# Altium PCB CNC.PcbDoc (part 2 of 3)
Units mm, origin at the board's own origin, x right, y up, seen from the top; angles counter-clockwise.
Board outline 148.41 x 98.24 mm, 4 copper layers (Top Layer, Mid-Layer 1, Ground Plane in NEGATIVE, Bottom Layer), stack 0.867 mm thick; 230 components, 218 nets, 997 pads, 307 vias.
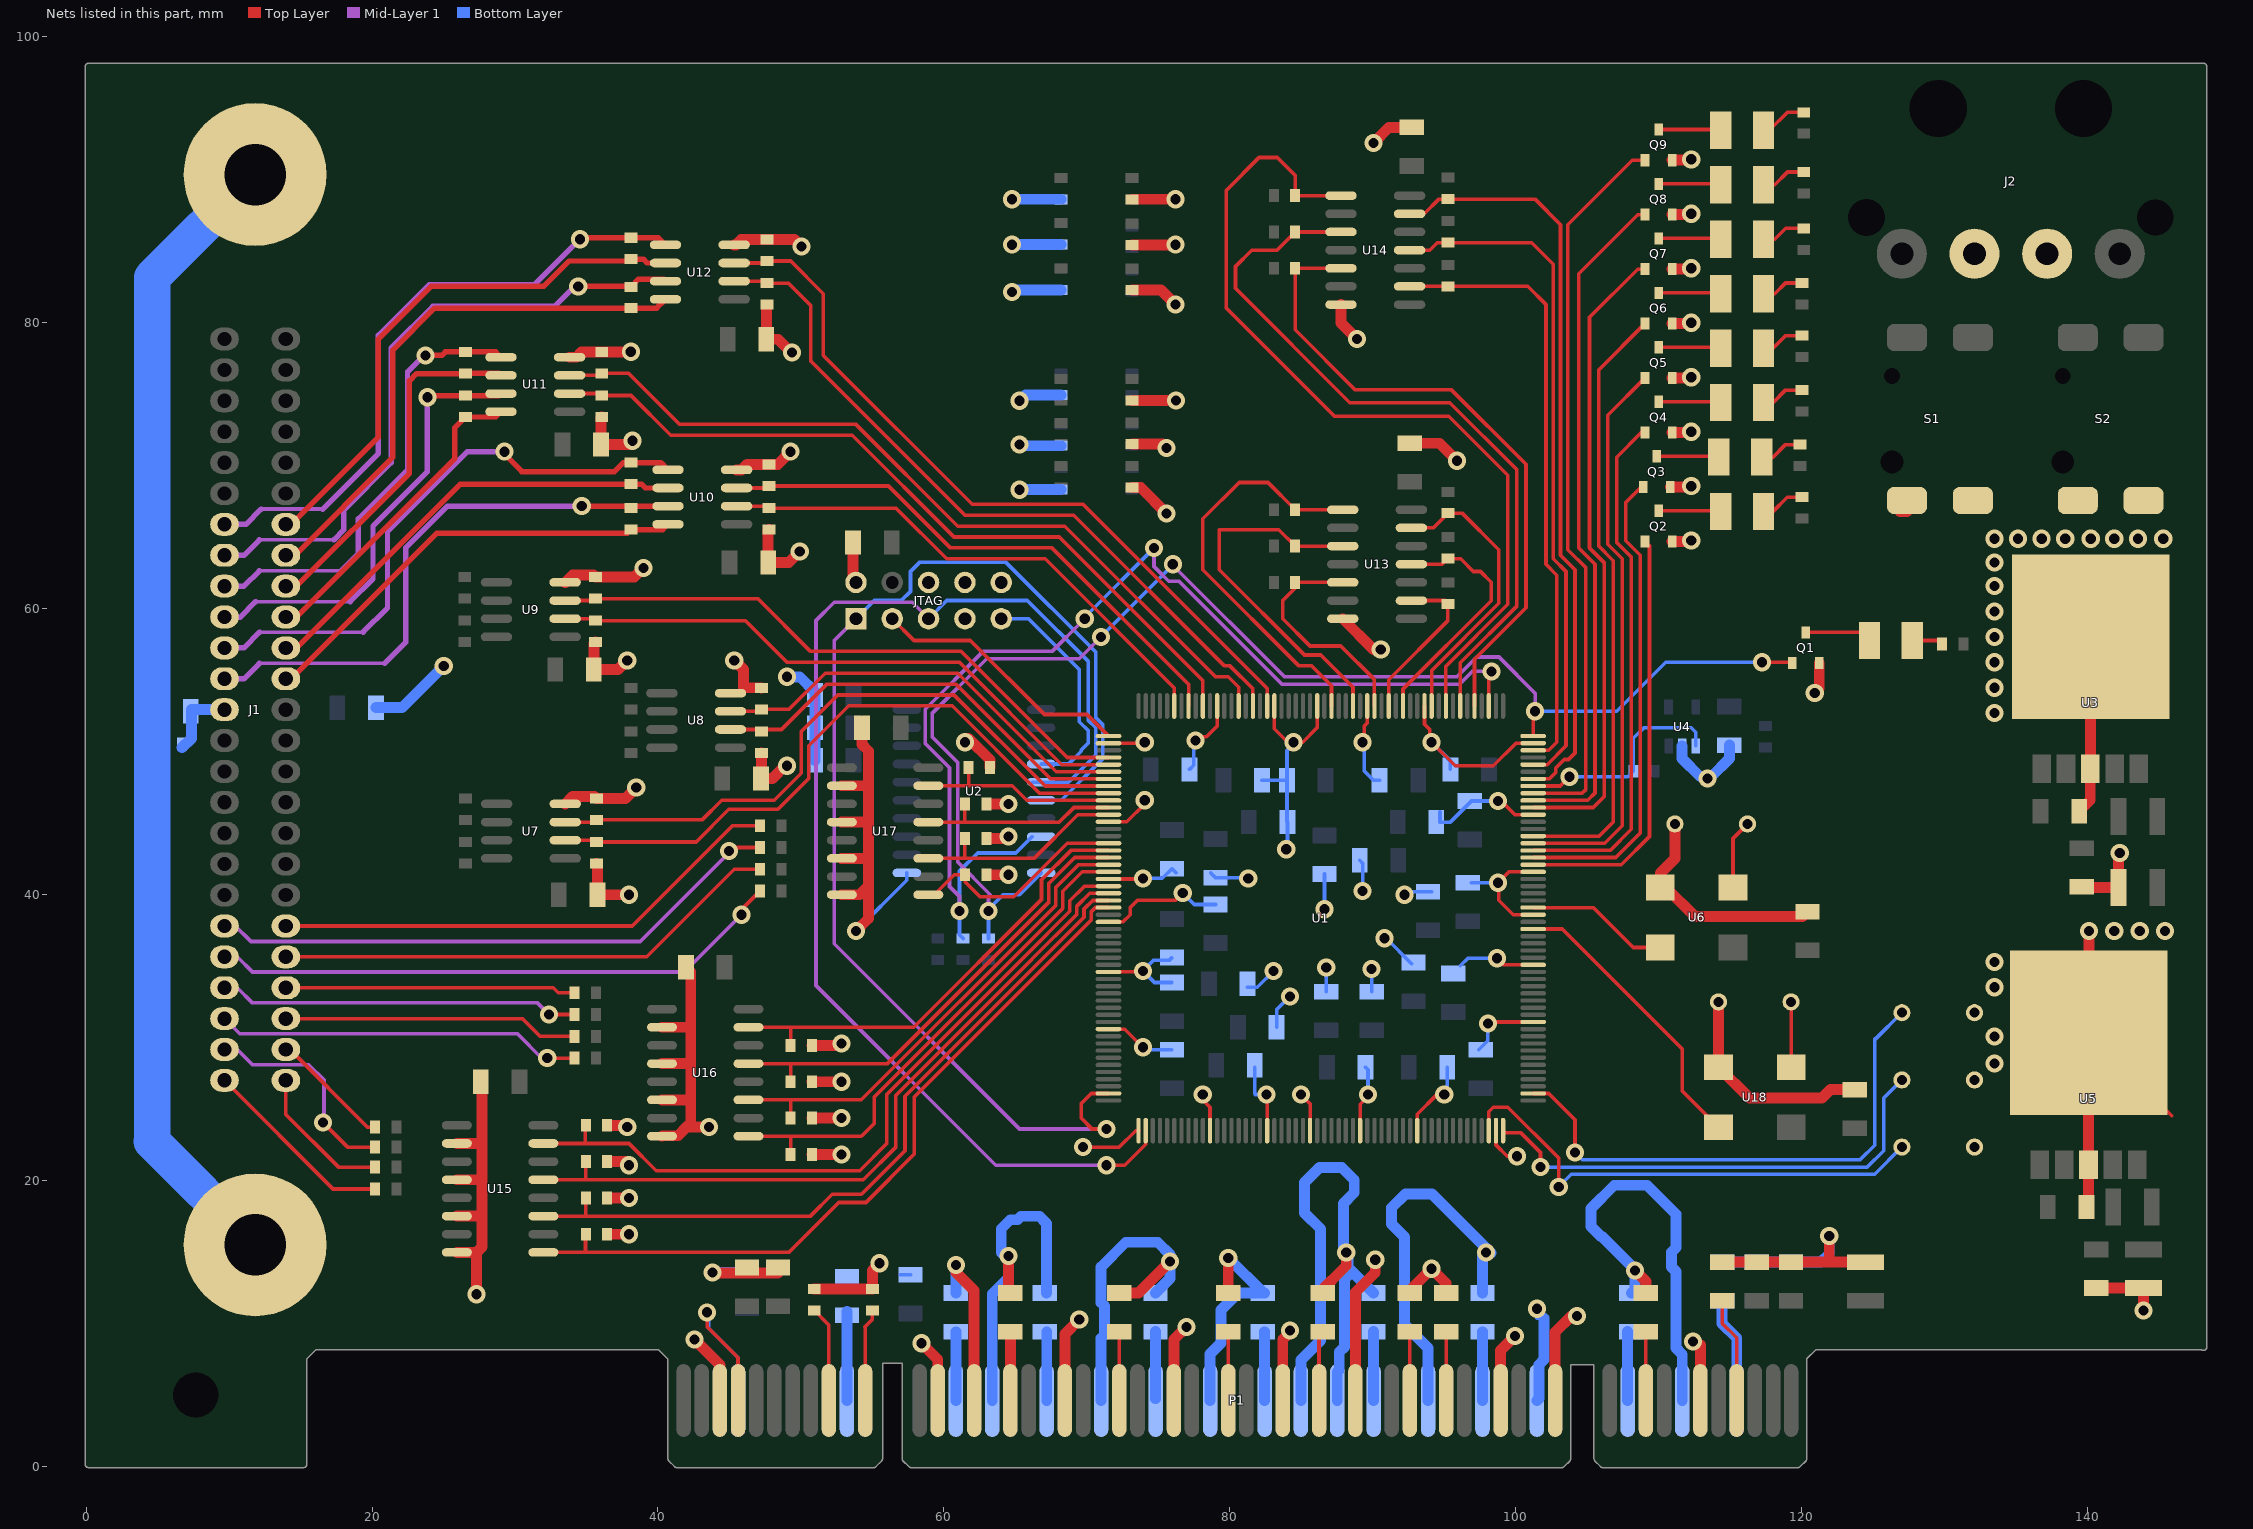
[diagram p4: the nets of this part, all layers, seen from the top]

## Via types
v1: diameter 1.27, hole 0.711, Top Layer to Bottom Layer, 303 vias
v2: diameter 2.032, hole 1.016, Top Layer to Bottom Layer, 3 vias
v3: diameter 1.27, hole 0.711, Top Layer to Bottom Layer, tented top, 1 vias

## Nets (pads, with @x,y where several pads share a name; then routed paths per layer and width w, separated by ;. In a path a pad name is that pad's centre, name@x,y a point inside that pad or via, vN(x,y) a via of type N, cw(c..) or ccw(c..) an arc to the next point about the centre after c; other vN are vias at no path point) (continued)
AD_N: J1.39 R50.2 U10.7 | length 39.8
  Top Layer w0.381: v1(34.671,67.183) R50.2@37.961,67.183 ; R50.2@38.1,67.044 R50.2@37.961,67.183 ; U10.7@40.422,67.183 R50.2@37.961,67.183
  Mid-Layer 1 w0.254: 12.116,56.185 20.879,56.185
  Mid-Layer 1 w0.381: J1.39@9.677,55.107 11.038,55.107 12.116,56.185 ; 20.879,56.185 22.352,57.658 22.352,64.262 25.273,67.183 v1(34.671,67.183)
AD_P: J1.12 R50.1 U10.8 | length 31.2
  Top Layer w0.381: J1.12@13.97,55.107 14.34,55.107 24.511,65.278 37.834,65.278 R50.1@38.1,65.544 40.331,65.544 U10.8@40.7,65.913
AP_N: J1.40 R51.2 U10.5 | length 41.4
  Top Layer w0.381: v1(29.261,70.993) 29.261,70.815 30.48,69.596 36.957,69.596 37.58,70.219 R51.2@38.1,70.219 40.204,70.219 U10.5@40.7,69.723
  Mid-Layer 1 w0.254: 12.141,58.369 19.38,58.369
  Mid-Layer 1 w0.381: J1.40@9.677,57.267 11.039,57.267 12.141,58.369 ; 19.38,58.369 21.082,60.071 21.082,65.405 26.67,70.993 29.007,70.993 29.261,70.739 29.337,70.739 29.261,70.815 v1(29.261,70.993)
AP_P: J1.11 R51.1 U10.6 | length 31.6
  Top Layer w0.381: J1.11@13.97,57.267 14.722,57.267 26.174,68.719 R51.1@38.1,68.719 38.85,68.719 39.116,68.453 U10.6@40.7,68.453
AUX_CLK1: U1.80 U6.3 | length 10.1
  Top Layer w0.254: U1.80@101.21,39.104 105.422,39.104 108.213,36.313 U6.3@110.109,36.313
AUX_CLK2: U1.77 U18.3 | length 20.4
  Top Layer w0.254: U1.77@101.21,37.604 103.239,37.604 111.633,29.21 111.633,26.28 U18.3@114.173,23.74
BD_N: J1.41 R52.2 U11.7 | length 31
  Top Layer w0.381: v1(23.876,74.803) 23.991,74.918 R52.2@26.543,74.918 28.877,74.918 U11.7@29.016,75.057
  Mid-Layer 1 w0.254: 11.862,60.503 18.466,60.503
  Mid-Layer 1 w0.381: J1.41@9.677,59.427 10.786,59.427 11.862,60.503 ; 18.466,60.503 20.066,62.103 20.066,65.786 23.876,69.596 v1(23.876,74.803)
BD_P: J1.10 R52.1 U11.8 | length 22.3
  Top Layer w0.381: J1.10@13.97,59.427 14.723,59.427 25.781,70.485 25.781,72.656 R52.1@26.543,73.418 28.647,73.418 U11.8@29.016,73.787
BP_N: J1.42 R53.2 U11.5 | length 31.7
  Top Layer w0.381: v1(23.749,77.724) 24.892,77.724 25.134,77.966 R53.2@26.543,77.966 28.647,77.966 U11.5@29.016,77.597
  Mid-Layer 1 w0.254: 12.116,62.662 17.831,62.662
  Mid-Layer 1 w0.381: J1.42@9.677,61.587 11.041,61.587 12.116,62.662 ; 17.831,62.662 19.05,63.881 19.05,66.294 22.479,69.723 22.479,76.581 23.622,77.724 v1(23.749,77.724)
BP_P: J1.9 R53.1 U11.6 | length 25.1
  Top Layer w0.381: J1.9@13.97,61.587 14.724,61.587 22.606,69.469 22.606,75.946 23.114,76.454 26.531,76.454 R53.1@26.543,76.466 28.877,76.466 U11.6@29.016,76.327
CD_N: J1.43 R54.2 U12.7 | length 44.4
  Top Layer w0.381: v1(34.417,82.55) 38.076,82.55 R54.2@38.1,82.526 38.632,83.058 40.387,83.058 U12.7@40.526,82.919
  Mid-Layer 1 w0.254: 12.116,64.821 17.323,64.821
  Mid-Layer 1 w0.381: J1.43@9.677,63.747 11.042,63.747 12.116,64.821 ; 17.323,64.821 18.034,65.532 18.034,66.929 21.336,70.231 21.336,78.232 24.257,81.153 32.766,81.153 34.163,82.55 v1(34.417,82.55)
CD_P: J1.8 R54.1 U12.8 | length 38.4
  Top Layer w0.381: J1.8@13.97,63.747 14.598,63.747 21.463,70.612 21.463,78.105 24.384,81.026 R54.1@38.1,81.026 39.903,81.026 U12.8@40.526,81.649
CP_N: J1.44 R55.2 U12.5 | length 44.2
  Top Layer w0.381: v1(34.544,85.852) 34.647,85.955 R55.2@38.1,85.955 40.03,85.955 U12.5@40.526,85.459
  Mid-Layer 1 w0.254: 12.243,66.98 16.561,66.98
  Mid-Layer 1 w0.381: J1.44@9.677,65.907 11.17,65.907 12.243,66.98 ; 16.561,66.98 20.447,70.866 20.447,79.121 24.003,82.677 31.369,82.677 v1(34.544,85.852)
CP_P: J1.7 R55.1 U12.6 | length 38.4
  Top Layer w0.381: J1.7@13.97,65.907 14.345,65.907 20.447,72.009 20.447,78.867 24.13,82.55 32.004,82.55 33.782,84.328 37.973,84.328 R55.1@38.1,84.455 38.977,84.455 39.243,84.189 U12.6@40.526,84.189
FPGA_AD: R75.2 U1.151 U10.2 | length 37.1
  Top Layer w0.254: U10.2@45.5,67.183 47.613,67.183 R75.2@47.752,67.044 56.654,67.044 60.198,63.5 67.078,63.5 76.11,54.468 U1.151@76.11,53.204
FPGA_AP: R76.1 U1.149 U10.3 | length 38.9
  Top Layer w0.254: U10.3@45.5,68.453 47.613,68.453 R76.1@47.752,68.592 56.122,68.592 60.452,64.262 67.564,64.262 77.11,54.716 U1.149@77.11,53.204
FPGA_BD: R61.1 U1.147 U11.2 | length 54.4
  Top Layer w0.254: U11.2@33.816,75.057 35.929,75.057 R61.1@36.068,74.918 38.112,74.918 40.894,72.136 53.594,72.136 60.706,65.024 68.072,65.024 78.11,54.986 U1.147@78.11,53.204
FPGA_BP: R62.2 U1.142 U11.3 | length 57.3
  Top Layer w0.254: U11.3@33.816,76.327 35.929,76.327 R62.2@36.068,76.466 37.961,76.466 41.529,72.898 53.848,72.898 60.96,65.786 68.453,65.786 78.994,55.245 79.883,55.245 80.61,54.518 U1.142@80.61,53.204
FPGA_CD: R79.2 U1.140 U12.2 | length 51.6
  Top Layer w0.254: U12.2@45.326,82.919 47.486,82.919 R79.2@47.625,82.78 49.125,82.78 50.673,81.232 50.673,77.343 61.468,66.548 69.088,66.548 79.629,56.007 80.01,56.007 81.61,54.407 U1.140@81.61,53.204
FPGA_CP: R80.1 U1.138 U12.3 | length 53.5
  Top Layer w0.254: U12.3@45.326,84.189 47.486,84.189 R80.1@47.625,84.328 49.276,84.328 51.562,82.042 51.562,77.724 61.976,67.31 69.723,67.31 82.61,54.423 U1.138@82.61,53.204
FPGA_IN1: R90.2 U1.178 U15.15 | length 52.3
  Top Layer w0.254: U15.15@31.981,22.606 34.914,22.606 ; R90.2@34.949,23.876 34.914,23.841 34.914,22.606 ; 65.756,35.784 56.007,26.035 56.007,22.606 54.102,20.701 39.878,20.701 37.973,22.606 34.914,22.606 ; 65.756,35.792 68.807,38.842 68.807,39.583 69.827,40.604 U1.178@71.51,40.604
FPGA_IN2: R89.2 U1.179 U15.13 | length 51.7
  Top Layer w0.254: U15.13@31.981,20.066 34.925,20.066 ; R89.2@34.822,21.209 R89.2@34.949,21.336 34.949,20.09 34.925,20.066 ; 66.182,35.518 69.302,38.637 69.302,39.208 70.198,40.104 U1.179@71.51,40.104 ; 66.186,35.514 56.642,25.97 56.642,22.352 54.356,20.066 34.925,20.066
FPGA_IN3: R88.2 U1.180 U15.11 | length 52.7
  Top Layer w0.254: U15.11@31.981,17.526 35.052,17.526 ; R88.2@34.822,18.669 R88.2@34.949,18.796 34.949,17.629 35.052,17.526 ; U1.180@71.51,39.604 70.398,39.604 69.797,39.003 69.797,38.432 66.681,35.316 66.681,35.309 57.277,25.904 57.277,22.098 54.229,19.05 52.197,19.05 50.673,17.526 35.052,17.526
FPGA_IN4: R87.2 U1.181 U15.9 | length 53.5
  Top Layer w0.254: U15.9@31.981,14.986 34.925,14.986 ; R87.2@34.949,16.256 34.925,16.232 34.925,14.986 ; U1.181@71.552,39.091 71.534,39.109 70.604,39.109 70.292,38.798 70.292,38.227 67.177,35.111 67.177,35.103 57.912,25.839 57.912,21.844 54.547,18.479 52.642,18.479 49.149,14.986 34.925,14.986
FPGA_IN5: R106.2 U1.173 U16.15 | length 32.4
  Top Layer w0.254: U16.15@46.332,30.734 49.276,30.734 ; R106.2@49.276,29.464 49.276,30.734 ; U1.173@71.51,43.104 68.885,43.104 66.825,41.044 66.825,39.663 57.896,30.734 49.276,30.734
FPGA_IN6: R105.2 U1.174 U16.13 | length 33.2
  Top Layer w0.254: U16.13@46.332,28.194 49.149,28.194 ; R105.2@49.276,26.924 49.276,28.067 49.149,28.194 ; U1.174@71.51,42.604 69.147,42.604 67.321,40.778 67.321,39.458 56.057,28.194 49.149,28.194
FPGA_IN7: R104.2 U1.175 U16.11 | length 34
  Top Layer w0.254: U16.11@46.332,25.654 49.276,25.654 ; R104.2@49.276,24.384 49.276,25.654 ; U1.175@71.51,42.104 69.409,42.104 67.816,40.511 67.816,39.253 54.217,25.654 49.276,25.654
FPGA_IN8: R103.2 U1.176 U16.9 | length 35.9
  Top Layer w0.254: U16.9@46.332,23.114 49.276,23.114 ; R103.2@49.276,21.844 49.276,23.114 ; 55.118,25.837 55.118,24.003 54.229,23.114 49.276,23.114 ; 55.12,25.856 64.389,35.125 68.311,39.048 68.311,40.244 69.671,41.604 U1.176@71.51,41.604
FPGA_IN9: R102.2 U1.166 U17.15 | length 14.3
  Top Layer w0.254: U17.15@58.905,47.625 61.722,47.625 ; R102.2@61.734,48.895 61.734,47.637 61.722,47.625 ; U1.166@71.51,46.604 65.791,46.604 64.77,47.625 61.722,47.625
FPGA_IN10: R101.2 U1.167 U17.13 | length 14
  Top Layer w0.254: U17.13@58.905,45.085 61.468,45.085 ; R101.2@61.468,46.089 61.468,45.085 ; U1.167@71.51,46.104 69.091,46.104 68.072,45.085 61.468,45.085
FPGA_IN11: R100.2 U1.168 U17.11 | length 15
  Top Layer w0.254: U17.11@58.905,42.545 61.468,42.545 ; R100.2@61.468,43.676 61.468,42.545 ; U1.168@71.51,45.604 69.353,45.604 66.294,42.545 61.468,42.545
FPGA_IN12: R99.2 U1.172 U17.9 | length 15.7
  Top Layer w0.254: U17.9@58.905,40.005 59.33,40.005 60.727,41.402 R99.2@61.48,41.402 61.48,40.904 62.519,39.865 64.884,39.865 68.623,43.604 U1.172@71.51,43.604
FPGA_OUT1: R63.1 U1.129 U13.1 | length 29
  Top Layer w0.254: U1.129@87.11,53.204 87.11,54.622 85.725,56.007 84.836,56.007 78.105,62.738 78.105,66.294 80.645,68.834 82.665,68.834 R63.1@84.57,66.929 U13.1@87.897,66.929
FPGA_OUT2: R64.1 U1.126 U13.3 | length 26
  Top Layer w0.254: U13.3@87.897,64.389 R64.1@84.57,64.389 83.427,65.532 79.248,65.532 79.248,62.738 85.217,56.769 86.36,56.769 88.61,54.519 U1.126@88.61,53.204
FPGA_OUT3: R65.1 U1.123 U13.5 | length 16.3
  Top Layer w0.254: U13.5@87.897,61.849 R65.1@84.57,61.849 84.57,61.456 83.693,60.579 83.693,59.309 85.598,57.404 87.757,57.404 90.11,55.051 U1.123@90.11,53.204
FPGA_OUT4: R66.1 U1.121 U13.9 | length 11.5
  Top Layer w0.254: U1.121@91.11,53.204 91.11,55.042 95.25,59.182 R66.1@95.25,60.337 95.008,60.579 U13.9@92.697,60.579
FPGA_OUT5: R67.1 U1.119 U13.11 | length 17.7
  Top Layer w0.254: U1.119@92.11,53.204 92.11,54.391 98.285,60.566 98.285,61.862 97.536,62.611 97.028,62.611 96.139,63.5 95.262,63.5 R67.1@95.25,63.512 94.857,63.119 U13.11@92.697,63.119
FPGA_OUT6: R68.1 U1.115 U13.13 | length 20.5
  Top Layer w0.254: U13.13@92.697,65.659 94.222,65.659 R68.1@95.25,66.687 95.262,66.675 96.266,66.675 98.806,64.135 98.806,60.387 94.11,55.691 U1.115@94.11,53.204
FPGA_OUT7: R69.1 U1.113 U14.1 | length 61.6
  Top Layer w0.254: U14.1@87.77,88.9 R69.1@84.57,88.9 84.57,90.309 83.312,91.567 82.042,91.567 79.756,89.281 79.756,81.026 87.313,73.469 95.314,73.469 99.441,69.342 99.441,60.321 95.11,55.99 U1.113@95.11,53.204
FPGA_OUT8: R70.1 U1.111 U14.3 | length 53
  Top Layer w0.254: U14.3@87.77,86.36 R70.1@84.57,86.36 83.3,85.09 81.534,85.09 80.391,83.947 80.391,82.423 88.392,74.422 95.377,74.422 100.076,69.723 100.076,60.198 96.11,56.232 U1.111@96.11,53.204
FPGA_OUT9: R71.1 U1.109 U14.5 | length 45.9
  Top Layer w0.254: U14.5@87.77,83.82 R71.1@84.57,83.82 84.57,79.514 88.773,75.311 95.504,75.311 100.711,70.104 100.711,60.071 97.11,56.47 U1.109@97.11,53.204
FPGA_OUT10: R72.1 U1.102 U14.9 | length 42.9
  Top Layer w0.254: U14.9@92.57,82.55 95.238,82.55 R72.1@95.25,82.562 100.826,82.562 102.108,81.28 102.108,63.119 102.87,62.357 102.87,50.673 102.301,50.104 U1.102@101.21,50.104
FPGA_OUT11: R73.1 U1.100 U14.11 | length 47.8
  Top Layer w0.254: U14.11@92.57,85.09 93.98,85.09 94.5,85.61 R73.1@95.25,85.61 101.104,85.61 102.616,84.098 102.616,63.5 103.505,62.611 103.505,50.419 102.19,49.104 U1.100@101.21,49.104
FPGA_OUT12: R74.1 U1.98 U14.13 | length 53
  Top Layer w0.254: U14.13@92.57,87.63 93.599,87.63 94.627,88.658 R74.1@95.25,88.658 101.334,88.658 103.124,86.868 103.124,63.754 104.14,62.738 104.14,49.911 103.688,49.459 103.383,49.459 102.785,48.861 102.785,48.556 102.333,48.104 U1.98@101.21,48.104
FPGA_RESET: R12.1 U1.97 U4.1 | length 15.5
  Top Layer w0.254: U1.97@101.21,47.604 103.103,47.604 v1(103.759,48.26)
  Bottom Layer w0.254: v1(103.759,48.26) 107.835,48.26 R12.1@108.216,48.641 108.216,50.939 108.966,51.689 112.268,51.689 112.583,51.374 U4.1@112.583,50.419
FPGA_XD: R81.1 U1.165 U7.2 | length 45.9
  Top Layer w0.254: U7.2@33.515,43.815 35.56,43.815 R81.1@35.687,43.688 42.672,43.688 44.958,45.974 48.387,45.974 50.546,48.133 50.546,50.419 53.34,53.213 60.579,53.213 66.688,47.104 U1.165@71.51,47.104
FPGA_XP: R82.2 U1.164 U7.3 | length 46
  Top Layer w0.254: U7.3@33.515,45.085 35.536,45.085 R82.2@35.687,45.236 43.077,45.236 44.45,46.609 48.133,46.609 50.025,48.501 50.025,51.422 52.578,53.975 60.706,53.975 67.077,47.604 U1.164@71.51,47.604
FPGA_YD: R77.2 U1.163 U8.2 | length 30.6
  Top Layer w0.254: U8.2@45.072,51.562 47.105,51.562 R77.2@47.244,51.423 47.383,51.562 48.641,51.562 51.816,54.737 60.833,54.737 67.466,48.104 U1.163@71.51,48.104
FPGA_YP: R78.1 U1.162 U8.3 | length 30.4
  Top Layer w0.254: U8.3@45.072,52.832 47.105,52.832 R78.1@47.244,52.971 49.161,52.971 51.689,55.499 60.96,55.499 67.855,48.604 U1.162@71.51,48.604
FPGA_ZD: R59.1 U1.161 U9.2 | length 42.2
  Top Layer w0.254: U9.2@33.502,59.309 35.488,59.309 R59.1@35.627,59.17 46.113,59.17 49.022,56.261 61.087,56.261 68.244,49.104 U1.161@71.51,49.104
FPGA_ZP: R60.2 U1.160 U9.3 | length 42.7
  Top Layer w0.254: U9.3@33.502,60.579 35.488,60.579 R60.2@35.627,60.718 46.978,60.718 50.673,57.023 61.214,57.023 68.633,49.604 U1.160@71.51,49.604
GND: C1.1 Cb12.+ Cb13.+ Cb18.+ Cb19.+ Cb20.+ Cb26.+ Cb28.+ Cb38.+ Cb39.+ Cb53.+ Cb65.+ Cb66.+ Cb76.+ Cb78.+ Cb91.+ Cb92.+ Cb105.+ Cb117.+ Cb118.+ Cb128.+ Cb130.+ Cb143.+ Cb144.+ Cb156.+ Cb170.+ Cb171.+ Cb184.+ Cb186.+ Cb196.+ Cb197.+ Cb208.+ CbA5.+ CbA8.+ CbA10.+ CbA16.+ CbA21.+ CbA27.+ CbA33.+ CbA39.+ CbA45.+ CbA53.+ CbA59.+ CbA61.+ CbA62.+ CbB5.+ CbB6.+ CbB19.+ CbB25.+ CbB31.+ CbB36.+ CbB41.+ CbB43.+ CbB54.+ CbB59.+ CbB61.+ CbB62.+ CbJ1.+ CbJ.+ CbU4.+ CbU6.+ CbU7.+ CbU8.+ CbU9.+ CbU10.+ CbU11.+ CbU12.+ CbU13.+ CbU14.+ CbU15.+ CbU16.+ CbU17.+ CbU18.+ Cp1.+ Cp2.+ Cp3.+ Cp4.+ J1.38 J2.2 J2.3 JTAG.2 JTAG.6 JTAG.7 JTAG.8 JTAG.10 M0.1 M1.1 M2.1 O1E.1 O2E.1 P1.A18 P1.A24 P1.A30 P1.A35 P1.A37 P1.A42 P1.A48 P1.A56 P1.B3 P1.B15 P1.B17 P1.B22 P1.B28 P1.B34 P1.B38 P1.B46 P1.B49 P1.B57 Q1.2 Q2.2 Q3.2 Q4.2 Q5.2 Q6.2 Q7.2 Q8.2 Q9.2 R5.1 R6.1 R8.2 R10.2 R21.1 R22.2 R23.2 R24.2 R25.2 R26.2 R27.2 R28.2 R29.2 R30.2 R31.2 R32.2 R33.2 R59.2 R60.1 R61.2 R62.1 R75.1 R76.2 R77.1 R78.2 R79.1 R80.2 R81.2 R82.1 R87.1 R88.1 R89.1 R90.1 R99.1 R100.1 R101.1 R102.1 R103.1 R104.1 R105.1 R106.1 R107.2 S1.C1 S1.C2 S2.C1 S2.C2 U1.1 U1.11 U1.19 U1.25 U1.32 U1.40 U1.51 U1.64 U1.72 U1.79 U1.85 U1.93 U1.103 U1.116 U1.124 U1.131 U1.137 U1.145 U1.158 U1.169 U1.177 U1.183 U1.190 U1.198 U2.11 U3.G U4.2 U5.G U6.2 U7.4 U8.4 U9.4 U10.4 U11.4 U12.4 U13.7 U14.7 U15.2 U15.4 U15.6 U15.8 U16.2 U16.4 U16.6 U16.8 U17.2 U17.4 U17.6 U17.8 U18.2 | length 747.8
  Top Layer w0.254: v1(42.545,8.89) v1@42.799,8.89 ; v1(69.723,22.352) 72.263,22.352 73.415,23.504 U1.1@73.61,23.504 ; U1.198@71.51,30.604 72.647,30.604 v1(73.914,29.337) ; U1.190@71.51,34.604 73.847,34.604 v1(73.914,34.671) ; U1.183@71.51,38.104 72.521,38.104 73.025,38.608 73.025,39.116 73.533,39.624 76.2,39.624 v1(76.708,40.132) ; U1.177@71.51,41.104 73.87,41.104 v1(73.914,41.148) ; U1.169@71.51,45.104 72.79,45.104 74.041,46.355 v1(74.041,46.609) ; U1.158@71.51,50.604 73.972,50.604 v1(74.041,50.673) ; v1(77.597,50.8) 77.597,50.927 77.788,50.736 78.105,51.054 78.359,51.054 79.11,51.805 U1.145@79.11,53.204 ; v1@77.978,25.781 77.978,26.035 v1(78.105,26.035) 78.105,25.654 78.61,25.149 U1.11@78.61,23.504 ; U1.19@82.61,24.393 v1@82.61,26.102 ; U1.137@83.11,53.204 83.11,51.614 84.051,50.673 v1(84.455,50.673) 85.09,50.673 86.11,51.693 U1.131@86.11,53.204 ; v1@84.201,9.398 v1(84.201,9.525) v1@84.201,9.652 ; v1(84.963,26.035) 85.61,25.388 U1.25@85.61,23.504 ; U1.32@89.11,23.504 89.11,25.356 89.662,25.908 v1(89.662,26.035) ; v1(89.281,50.673) 89.408,50.8 89.408,51.816 89.61,52.018 U1.124@89.61,53.204 ; U1.40@93.11,23.504 93.11,24.657 94.488,26.035 v1(94.996,26.035) ; U1.116@93.61,53.204 93.61,51.932 93.98,51.562 93.98,50.8 v1(94.107,50.673) 95.758,49.022 98.425,49.022 100.007,50.604 U1.103@101.21,50.604 ; v1@98.044,31.104 U1.64@101.21,31.104 ; U1.51@98.61,23.504 98.61,22.497 99.39,21.717 v1(100.076,21.717) ; v1(98.679,35.56) 99.135,35.104 U1.72@101.21,35.104 ; v1(98.759,46.562) 98.933,46.736 98.933,46.609 99.938,45.604 U1.93@101.21,45.604 ; U1.79@101.21,38.604 99.826,38.604 98.806,39.624 98.806,40.894 99.516,41.604 U1.85@101.21,41.604 ; v1(112.395,8.763) 112.649,8.763 v1@112.909,8.503 ; U5.G@140.081,30.353 145.881,24.553 ; v1@76.585,9.931 76.737,9.779 v1(76.962,9.779) 76.81,9.931 v1@76.585,9.931
  Top Layer w0.762: U15.8@25.931,14.986 27.305,14.986 ; U15.6@25.931,17.526 27.559,17.526 ; U15.4@25.931,20.066 27.559,20.066 ; U15.2@25.931,22.606 27.686,22.606 ; v1(27.305,12.065) 27.305,14.986 ; CbU15.+@27.606,26.924 27.686,26.844 27.686,22.606 ; U9.4@33.502,61.849 33.528,61.849 34.036,62.357 35.488,62.357 R60.1@35.627,62.218 38.342,62.218 v1(38.989,62.865) ; U7.4@33.515,46.355 34.023,46.863 35.56,46.863 R82.1@35.687,46.736 37.719,46.736 v1(38.481,47.498) ; U11.4@33.816,77.597 34.29,77.597 34.659,77.966 R62.1@36.068,77.966 38.088,77.966 v1(38.1,77.978) ; R59.2@35.627,57.67 35.513,57.556 CbU9.+@35.513,55.753 37.211,55.753 v1(37.846,56.388) ; R81.2@35.687,42.188 35.767,42.108 CbU7.+@35.767,40.005 v1(37.973,40.005) ; R61.2@36.068,73.418 36.021,73.371 CbU11.+@36.021,71.501 37.973,71.501 v1(38.227,71.755) ; R87.1@36.449,16.256 v1(37.973,16.256) ; R88.1@36.449,18.796 v1(37.973,18.796) ; R89.1@36.449,21.336 37.719,21.336 v1(37.973,21.082) ; R90.1@36.449,23.876 37.719,23.876 v1(37.846,23.749) ; U16.8@40.282,23.114 40.315,23.147 41.402,23.147 42.004,23.749 ; U16.6@40.282,25.654 41.957,25.654 ; U16.4@40.282,28.194 41.83,28.194 ; U16.2@40.282,30.734 42.291,30.734 ; CbU16.+@41.957,34.925 42.291,34.591 42.291,30.734 ; v1(42.545,8.89) 44.329,7.106 P1.B3@44.329,4.628 ; v1(43.561,23.749) 42.004,23.749 ; v1(43.815,13.589) 43.862,13.542 CbB6.+@48.387,13.542 ; U12.4@45.326,85.459 45.454,85.459 45.823,85.828 R80.2@47.625,85.828 49.554,85.828 v1(50.038,85.344) ; v1(45.339,56.388) 45.974,55.753 45.974,54.483 47.232,54.483 R78.2@47.244,54.471 ; U10.4@45.5,69.723 45.847,69.723 46.216,70.092 R76.2@47.752,70.092 48.375,70.092 v1(49.276,70.993) ; CbU8.+@47.197,48.133 CbU8.+@47.244,48.133 ; R77.1@47.244,49.923 CbU8.+@47.244,48.133 ; R79.1@47.578,81.233 CbU12.+@47.578,78.855 48.399,78.855 49.318,77.936 v1(49.361,77.936) ; R75.1@47.752,65.544 47.705,65.497 CbU10.+@47.705,63.246 49.149,63.246 v1(49.911,64.008) ; v1(49.022,49.022) 48.895,49.022 48.006,48.133 CbU8.+@47.244,48.133 ; R103.1@50.776,21.844 v1(52.832,21.844) ; R104.1@50.776,24.384 v1(52.832,24.384) ; R105.1@50.776,26.924 v1(52.832,26.924) ; R106.1@50.776,29.464 52.832,29.464 v1(52.832,29.591) ; R5.1@50.927,12.434 R6.1@54.991,12.434 54.991,13.716 v1(55.499,14.224) ; U17.8@52.855,40.005 54.102,40.005 54.737,40.64 ; U17.6@52.855,42.545 54.737,42.545 ; U17.4@52.855,45.085 54.737,45.085 ; U17.2@52.855,47.625 54.737,47.625 ; CbJ.+@53.641,64.643 53.641,62.056 JTAG.2@53.848,61.849 ; v1(53.848,37.465) 54.737,38.354 54.737,40.64 ; CbU17.+@54.276,51.689 54.276,50.499 54.737,50.038 54.737,47.625 ; v1(58.42,8.636) 59.569,7.487 P1.B15@59.569,4.628 ; v1(60.833,14.097) 60.833,13.589 62.109,12.313 P1.B17@62.109,4.628 ; v1(61.468,50.673) 61.595,50.8 v1@61.595,50.546 ; v1@61.722,50.927 63.234,49.415 R102.1@63.234,48.895 ; R99.1@63.234,41.402 64.389,41.402 v1(64.516,41.402) ; R100.1@63.234,43.942 64.262,43.942 64.389,44.069 v1(64.516,44.069) ; R101.1@63.234,46.355 64.262,46.355 v1(64.516,46.355) ; v1(64.516,14.732) 64.516,12.272 CbB19.+@64.643,12.145 ; P1.B22@68.459,4.628 68.459,9.277 v1(69.469,10.287) ; CbB25.+@72.263,12.145 CbB25.+@72.269,12.145 73.613,12.145 v1(75.819,14.351) ; R24.2@73.152,68.477 73.763,68.477 v1(75.565,66.675) ; R23.2@73.152,71.525 75.287,71.525 v1(75.565,71.247) ; R22.2@73.152,74.573 v1(76.224,74.573) ; R30.2@73.152,82.296 75.184,82.296 v1(76.2,81.28) ; R29.2@73.152,85.459 76.188,85.459 v1(76.2,85.471) ; R28.2@73.152,88.646 v1(76.2,88.646) ; P1.B28@76.079,4.628 76.079,8.896 v1(76.962,9.779) ; CbB31.+@79.883,12.145 v1(79.883,14.605) ; P1.B34@83.699,4.628 83.699,8.896 v1@84.201,9.398 ; CbB36.+@86.233,12.145 88.138,14.05 v1(88.138,14.986) ; U14.7@87.77,81.28 87.77,79.997 v1(88.9,78.867) ; U13.7@87.897,59.309 90.056,57.15 v1(90.551,57.15) ; P1.B38@88.779,4.628 88.779,12.198 90.17,13.589 v1(90.17,14.478) ; v1(90.043,92.583) 91.139,93.679 CbU14.+@92.71,93.679 ; CbB41.+@92.583,12.145 92.583,12.319 v1(94.107,13.843) 95.123,12.827 CbB43.+@95.123,12.145 ; CbU13.+@92.583,71.581 94.662,71.581 v1(95.885,70.358) ; P1.B46@98.939,4.628 98.939,8.134 v1(99.949,9.144) ; P1.B49@102.749,4.628 102.749,9.404 103.886,10.541 v1(104.267,10.541) ; v1(108.331,13.716) 109.093,12.954 CbB54.+@109.093,12.145 ; Q3.2@110.805,68.521 112.209,68.521 v1(112.268,68.58) ; Q2.2@110.932,64.711 112.209,64.711 v1(112.268,64.77) ; Q4.2@110.932,72.331 112.209,72.331 v1(112.268,72.39) ; Q5.2@110.932,76.141 112.209,76.141 v1(112.268,76.2) ; Q6.2@110.932,79.951 112.209,79.951 v1(112.268,80.01) ; Q7.2@110.932,83.761 112.209,83.761 v1(112.268,83.82) ; Q8.2@110.932,87.571 112.209,87.571 v1(112.268,87.63) ; Q9.2@110.932,91.381 112.209,91.381 v1(112.268,91.44) ; O1E.1@111.125,44.958 111.125,42.545 110.109,41.529 U6.2@110.109,40.513 110.49,40.513 112.522,38.481 120.062,38.481 CbU6.+@120.396,38.815 ; P1.B57@112.909,4.628 v1@112.909,8.503 ; O2E.1@114.173,32.512 U18.2@114.173,27.94 116.332,25.781 121.412,25.781 122,26.369 CbU18.+@123.698,26.369 CbU18.+@123.952,26.369 ; CbB59.+@114.427,14.304 CbB61.+@116.84,14.304 CbB62.+@119.253,14.304 121.92,14.304 ; v1(120.904,54.102) 121.219,54.417 Q1.2@121.219,56.202 ; v1(121.92,16.129) 121.92,14.304 ; R107.2@124.46,14.304 121.92,14.304 ; S1.C1@126.859,66.817 S1.C1@127.367,66.817 ; Cp1.+@139.399,45.847 140.179,46.627 U3.G@140.179,48.801 140.208,48.83 U3.G@140.208,58.039 ; Cp2.+@139.573,40.56 139.62,40.513 R8.2@142.16,40.513 142.16,42.846 v1(142.24,42.926) ; Cp3.+@140.052,18.306 U5.G@140.052,21.115 140.052,30.324 U5.G@140.081,30.353 v1(140.081,37.465) ; Cp4.+@140.97,12.493 R10.2@143.891,12.493 v1(143.891,10.922) ; 27.305,14.986 27.686,15.367 27.686,22.606 ; 42.004,23.749 42.291,24.036 42.291,30.734 ; 54.737,40.64 54.737,42.545 ; 54.737,42.545 54.737,45.085 ; 54.737,45.085 54.737,47.625
  Mid-Layer 1 w0.254: v1@77.978,25.781 77.978,26.035 v1(78.105,26.035)
  Bottom Layer w0.254: CbA5.+@46.181,13.589 CbA5.+@46.228,13.542 ; Cb20.+@50.974,53.975 Cb20.+@50.974,54.182 ; v1(53.848,37.465) 57.403,41.02 U2.11@57.403,41.529 ; CbA8.+@56.943,13.415 CbA8.+@57.658,13.415 ; v1(73.914,29.337) 74.088,29.163 Cb208.+@75.946,29.163 ; v1(73.914,41.148) 75.264,41.148 Cb170.+@75.946,41.83 Cb170.+@76.247,41.529 ; v1(75.819,14.351) v1@75.819,14.834 ; Cb197.+@75.946,33.862 74.723,33.862 v1(73.914,34.671) 74.676,35.433 75.772,35.433 Cb184.+@75.946,35.607 ; v1(76.708,40.132) 77.517,39.323 Cb186.+@78.994,39.323 ; Cb156.+@77.169,48.768 77.47,49.069 77.47,51.054 77.597,50.927 v1(77.597,50.8) ; Cb171.+@78.66,41.529 Cb171.+@78.994,41.195 81.233,41.195 v1(81.28,41.148) ; Cb196.+@81.233,33.528 81.915,33.528 v1(83.058,34.671) ; Cb12.+@81.741,27.94 81.741,26.082 81.788,26.035 v1(82.55,26.035) ; Cb144.+@82.249,48.006 Cb130.+@83.994,48.006 ; Cb13.+@83.265,30.734 83.265,31.957 v1(84.201,32.893) ; v1(83.947,43.18) 84.027,43.26 Cb143.+@84.027,45.085 83.994,45.118 Cb130.+@83.994,48.006 ; v1(84.455,50.673) 84.455,50.546 83.994,50.085 Cb130.+@83.994,48.006 ; v1(86.614,38.989) Cb128.+@86.614,41.449 ; Cb28.+@86.741,33.227 v1(86.741,34.925) v1@86.741,35.179 ; v1@87.935,15.189 v1(88.138,14.986) ; Cb91.+@89.074,42.418 89.281,42.211 v1(89.281,40.259) ; v1(89.281,50.673) 89.281,50.8 89.408,50.927 89.408,48.641 90.043,48.006 Cb117.+@90.471,48.006 ; Cb26.+@89.488,27.94 89.662,27.766 v1(89.662,26.035) ; Cb38.+@89.916,33.227 v1(89.916,34.798) v1@89.916,35.052 ; v1(90.805,36.957) 90.932,36.957 Cb66.+@92.71,35.179 ; v1(92.202,40.005) 92.409,40.212 Cb76.+@93.853,40.212 Cb76.+@94.107,40.212 ; v1(94.107,50.673) 95.424,49.356 Cb105.+@95.424,48.768 ; Cb118.+@94.695,45.819 94.695,45.085 95.424,45.085 96.901,46.562 v1(98.759,46.562) v1@98.933,46.736 ; v1(94.996,26.035) 95.203,26.242 Cb39.+@95.203,27.94 ; Cb65.+@96.115,35.028 96.647,35.56 v1(98.679,35.56) ; Cb78.+@96.901,40.847 v1(98.759,40.847) v1@98.933,41.021 ; Cb53.+@97.409,29.163 98.044,29.798 98.044,30.393 v1@98.437,30.786 ; v1(98.044,30.988) v1@98.425,30.988 ; v1@101.473,11.303 v1(101.473,11.049) 101.473,10.403 101.493,10.383 101.981,10.383
  Bottom Layer w0.762: R21.1@6.719,50.292 7.366,50.939 7.366,52.947 J1.38@9.677,52.947 ; CbJ1.+@20.273,53.086 22.098,53.086 v1(25.019,56.007) ; v1(43.815,13.589) CbA5.+@46.181,13.589 ; v1(49.022,55.245) 49.911,55.245 Cb20.+@50.974,54.182 ; Cb18.+@50.974,49.403 Cb19.+@50.974,51.689 Cb20.+@50.974,53.975 ; CbA16.+@60.833,12.145 v1(60.833,14.097) ; P1.A18@63.379,4.628 63.379,12.071 64.516,13.208 64.516,14.478 64.008,14.986 64.008,16.637 64.643,17.272 65.151,17.272 65.392,17.513 66.688,17.513 67.183,17.018 CbA21.+@67.183,12.145 ; v1(64.77,82.169) 64.897,82.296 R31.2@68.199,82.296 ; v1(64.77,85.471) R32.2@68.199,85.471 ; v1(64.77,88.646) R33.2@68.199,88.646 ; v1(65.278,68.326) 65.302,68.35 R25.2@68.199,68.35 ; v1(65.278,71.501) 65.369,71.41 R26.2@68.199,71.41 ; v1(65.278,74.549) 65.695,74.966 R27.2@68.199,74.966 ; P1.A24@70.999,4.628 70.999,8.979 71.222,9.202 71.222,11.245 70.999,11.468 70.999,13.976 72.72,15.697 74.955,15.697 v1@75.819,14.834 ; CbA27.+@74.803,12.145 75.819,13.161 v1(75.819,14.351) ; P1.A30@78.619,4.628 78.619,7.88 79.388,8.649 79.388,10.96 80.573,12.145 CbA33.+@82.296,12.145 CbA33.+@82.343,12.145 ; v1(79.883,14.605) CbA33.+@82.343,12.145 ; CbA33.+@82.423,12.145 CbA33.+@82.343,12.145 ; P1.A35@84.969,4.628 84.969,7.459 86.335,8.825 86.335,16.637 85.217,17.755 85.217,19.888 86.258,20.93 87.821,20.93 88.697,20.053 88.697,19.177 87.935,18.415 v1@87.935,15.189 ; P1.A37@87.509,4.628 87.509,6.622 87.648,6.762 87.648,8.019 88.011,8.382 88.011,13.106 88.265,13.36 88.265,13.923 ; v1(88.138,14.986) 88.265,14.859 88.265,13.923 ; CbA39.+@90.043,12.145 88.265,13.923 ; P1.A42@93.859,4.628 93.859,8.311 92.215,9.955 92.215,16.066 91.313,16.967 91.313,18.11 92.278,19.075 94.132,19.075 v1@98.26,14.948 ; CbA45.+@97.663,12.145 97.663,14.732 v1(97.917,14.986) ; P1.A48@101.479,4.628 101.618,4.768 101.618,7.129 101.981,7.491 101.981,10.383 ; CbA53.+@108.077,12.145 108.331,12.399 v1(108.331,13.716) 108.331,13.792 106.032,16.091 105.956,16.091 105.258,16.789 105.258,18.059 106.883,19.685 109.169,19.685 111.201,17.653 111.201,15.316 110.884,14.999 110.884,13.957 111.201,13.64 111.201,8.291 111.639,7.854 P1.A56@111.639,4.628 ; U4.2@111.633,50.419 111.633,49.53 112.903,48.26 113.665,48.26 114.935,49.53 CbU4.+@114.935,50.466 ; CbA59.+@114.427,14.304 CbA61.+@116.84,14.304 CbA62.+@119.253,14.304 121.332,14.304 121.92,14.892 v1(121.92,16.129)
  other v1: 133.477,28.194 133.477,30.099 133.477,33.528 133.477,35.306 141.859,37.465 143.637,37.465 145.415,37.465 113.411,48.133 133.477,52.705 133.477,54.483 133.477,56.261 133.477,58.039 133.477,59.817 133.477,61.595 133.477,63.246 133.477,64.897 135.128,64.897 136.779,64.897 138.43,64.897 140.208,64.897 141.859,64.897 143.51,64.897 145.288,64.897
IN1: J1.24 R83.2 | length 8.5
  Top Layer w0.254: J1.24@13.97,29.18 14.254,29.18 19.685,23.749 R83.2@20.205,23.749
IN2: J1.27 R84.2 | length 15.2
  Top Layer w0.254: v1(16.573,24.066) 18.288,22.352 R84.2@20.205,22.352
  Mid-Layer 1 w0.254: J1.27@9.677,29.18 10.571,29.18 11.633,28.118 15.57,28.118 16.637,27.051 v1@16.637,24.066
IN3: J1.25 R85.2 | length 10.1
  Top Layer w0.254: J1.25@13.97,27.02 13.97,24.638 17.653,20.955 R85.2@20.205,20.955
IN4: J1.26 R86.2 | length 13.7
  Top Layer w0.254: J1.26@9.677,27.02 17.272,19.425 20.199,19.425 R86.2@20.205,19.431
IN5: J1.22 R91.2 | length 20.4
  Top Layer w0.254: J1.22@13.97,33.5 32.667,33.5 33.02,33.147 R91.2@34.175,33.147
IN6: J1.29 R92.2 | length 25.3
  Top Layer w0.254: v1(32.385,31.623) R92.2@34.175,31.623
  Mid-Layer 1 w0.254: J1.29@9.677,33.5 10.569,33.5 11.633,32.436 31.572,32.436 v1(32.385,31.623)
IN7: J1.23 R93.2 | length 20.7
  Top Layer w0.254: J1.23@13.97,31.34 30.509,31.34 31.75,30.099 R93.2@34.175,30.099
IN8: J1.28 R94.2 | length 25.9
  Top Layer w0.254: J1.28@9.677,31.34 J1.28@9.935,31.34 ; v1(32.258,28.575) R94.2@34.175,28.575
  Mid-Layer 1 w0.254: J1.28@9.677,31.34 10.74,30.277 30.175,30.277 31.877,28.575 v1(32.258,28.575)
IN9: J1.20 R95.2 | length 36.1
  Top Layer w0.254: J1.20@13.97,37.82 38.201,37.82 45.212,44.831 R95.2@47.129,44.831
IN10: J1.31 R96.2 | length 40.7
  Top Layer w0.254: v1(44.958,43.053) 45.212,43.307 R96.2@47.129,43.307
  Mid-Layer 1 w0.254: J1.31@9.677,37.82 10.44,37.82 11.532,36.728 38.76,36.728 44.958,42.926 v1(44.958,43.053)
IN11: J1.21 R97.2 | length 35.7
  Top Layer w0.254: J1.21@13.97,35.66 39.216,35.66 45.339,41.783 R97.2@47.129,41.783
IN12: J1.30 R98.2 | length 40.5
  Top Layer w0.254: v1(45.847,38.608) 45.847,38.965 R98.2@47.141,40.259
  Mid-Layer 1 w0.254: J1.30@9.677,35.66 10.568,35.66 11.633,34.595 41.834,34.595 v1(45.847,38.608)
LED1: Q2.1 U1.86 | length 29.7
  Top Layer w0.254: U1.86@101.21,42.104 107.382,42.104 109.347,44.069 109.347,64.396 Q2.1@109.032,64.711
LED2: Q3.1 U1.87 | length 33.4
  Top Layer w0.254: U1.87@101.21,42.604 106.993,42.604 108.712,44.323 108.712,63.754 107.696,64.77 107.696,67.437 108.78,68.521 Q3.1@108.905,68.521
LED3: Q4.1 U1.88 | length 36.6
  Top Layer w0.254: U1.88@101.21,43.104 106.604,43.104 108.077,44.577 108.077,63.627 107.061,64.643 107.061,70.612 108.78,72.331 Q4.1@109.032,72.331
LED4: Q5.1 U1.89 | length 39.6
  Top Layer w0.254: U1.89@101.21,43.604 106.215,43.604 107.442,44.831 107.442,63.5 106.426,64.516 106.426,73.533 106.424,73.533 Q5.1@109.032,76.141
LED5: Q6.1 U1.90 | length 42.6
  Top Layer w0.254: U1.90@101.21,44.104 105.826,44.104 106.807,45.085 106.807,63.373 105.791,64.389 105.791,76.71 Q6.1@109.032,79.951
LED6: Q7.1 U1.94 | length 44.5
  Top Layer w0.254: U1.94@101.21,46.104 105.413,46.104 106.172,46.863 106.172,63.246 105.156,64.262 105.156,80.391 108.526,83.761 Q7.1@109.032,83.761
LED7: Q8.1 U1.95 | length 47.7
  Top Layer w0.254: U1.95@101.21,46.604 105.024,46.604 105.537,47.117 105.537,63.119 104.394,64.262 104.394,83.439 108.526,87.571 Q8.1@109.032,87.571
LED8: Q9.1 U1.96 | length 51.1
  Top Layer w0.254: U1.96@101.21,47.104 104.635,47.104 104.902,47.371 104.902,62.865 103.632,64.135 103.632,86.868 108.145,91.381 Q9.1@109.032,91.381
NetC1_2: C1.2 J1.51 J1.52 R21.2 | length 80.8
  Bottom Layer w2.54: 4.572,22.77 J1.52@11.825,15.517 ; 4.619,22.77 C1.2@4.619,52.832 4.619,83.171 J1.51@11.825,90.377
NetCbA10_-: CbA10.- P1.A10 | length 6.2
  Bottom Layer w0.254: P1.A10@53.213,4.634 P1.A10@53.219,4.628
  Bottom Layer w0.762: P1.A10@53.213,4.634 CbA10.-@53.213,10.588 CbA10.-@53.213,10.842
NetCbA16_-: CbA16.- P1.A16 | length 4.8
  Bottom Layer w0.254: CbA16.-@60.833,9.445 CbA16.-@60.839,9.439
  Bottom Layer w0.762: P1.A16@60.839,4.628 CbA16.-@60.839,9.439
NetCbA21_-: CbA21.- P1.A21 | length 4.8
  Bottom Layer w0.254: CbA21.-@67.183,9.445 CbA21.-@67.189,9.439
  Bottom Layer w0.762: P1.A21@67.189,4.628 CbA21.-@67.189,9.439
NetCbA27_-: CbA27.- P1.A27 | length 4.9
  Bottom Layer w0.254: P1.A27@74.809,4.628 P1.A27@74.93,4.75
  Bottom Layer w0.762: P1.A27@74.803,4.75 CbA27.-@74.803,9.445
NetCbA33_-: CbA33.- P1.A33 | length 4.8
  Bottom Layer w0.254: CbA33.-@82.423,9.445 CbA33.-@82.429,9.439
  Bottom Layer w0.762: P1.A33@82.429,4.628 CbA33.-@82.429,9.439
NetCbA39_-: CbA39.- P1.A39 | length 4.8
  Bottom Layer w0.254: P1.A39@90.043,4.634 P1.A39@90.049,4.628
  Bottom Layer w0.762: P1.A39@90.043,4.634 CbA39.-@90.043,9.445
NetCbA45_-: CbA45.- P1.A45 | length 4.8
  Bottom Layer w0.254: CbA45.-@97.663,9.445 CbA45.-@97.669,9.439
  Bottom Layer w0.762: P1.A45@97.669,4.628 CbA45.-@97.669,9.439
NetCbA53_-: CbA53.- P1.A53 | length 4.8
  Bottom Layer w0.254: P1.A53@107.823,4.634 P1.A53@107.829,4.628
  Bottom Layer w0.762: P1.A53@107.823,4.634 CbA53.-@107.823,9.445
NetCbA59_-: CbA59.- P1.A59 | length 7.4
  Bottom Layer w0.762: CbA59.-@114.427,11.604 114.427,10.015 115.449,8.994 P1.A59@115.449,4.628
NetCbB19_-: CbB19.- P1.B19 | length 4.8
  Top Layer w0.254: CbB19.-@64.643,9.445 CbB19.-@64.649,9.439
  Top Layer w0.762: P1.B19@64.649,4.628 CbB19.-@64.649,9.439
NetCbB25_-: CbB25.- P1.B25 | length 4.8
  Top Layer w0.254: CbB25.-@72.263,9.445 72.269,9.439 P1.B25@72.269,4.628
NetCbB31_-: CbB31.- P1.B31 | length 4.9
  Top Layer w0.254: P1.B31@79.883,4.75 CbB31.-@79.883,9.445 ; P1.B31@79.889,4.628 P1.B31@80.01,4.75
NetCbB36_-: CbB36.- P1.B36 | length 4.8
  Top Layer w0.254: P1.B36@86.233,4.634 CbB36.-@86.233,9.445
NetCbB41_-: CbB41.- P1.B41 | length 4.8
  Top Layer w0.254: CbB41.-@92.583,9.445 92.589,9.439 P1.B41@92.589,4.628
NetCbB43_-: CbB43.- P1.B43 | length 4.8
  Top Layer w0.254: CbB43.-@95.123,9.445 95.129,9.439 P1.B43@95.129,4.628
NetCbB54_-: CbB54.- P1.B54 | length 4.8
  Top Layer w0.254: CbB54.-@109.093,9.445 109.099,9.439 P1.B54@109.099,4.628
NetCbB59_-: CbB59.- P1.B59 | length 7.4
  Top Layer w0.254: CbB59.-@114.427,11.604 114.427,10.033 115.449,9.011 P1.B59@115.449,4.628
NetD1_1: D1.1 R4.1 | length 2.7
  Top Layer w0.254: D1.1@127.23,57.785 D1.1@127.738,57.785 129.552,57.785 R4.1@129.806,57.531
NetD1_2: D1.2 Q1.3 | length 4.7
  Top Layer w0.254: Q1.3@120.269,58.352 124.171,58.352 D1.2@124.738,57.785
NetD2_1: D2.1 R13.1 | length 3.1
  Top Layer w0.254: D2.1@117.324,66.802 117.983,66.802 118.987,67.806 R13.1@120.015,67.806
NetD2_2: D2.2 Q2.3 | length 4.4
  Top Layer w0.254: Q2.3@109.982,66.861 114.265,66.861 D2.2@114.324,66.802
NetD3_1: D3.1 R14.1 | length 3.1
  Top Layer w0.254: D3.1@117.197,70.612 117.983,70.612 118.86,71.489 R14.1@119.888,71.489
NetD3_2: D3.2 Q3.3 | length 4.4
  Top Layer w0.254: Q3.3@109.855,70.671 114.138,70.671 D3.2@114.197,70.612
NetD4_1: D4.1 R15.1 | length 3.1
  Top Layer w0.254: D4.1@117.324,74.422 117.983,74.422 118.86,75.299 R15.1@120.015,75.299
NetD4_2: D4.2 Q4.3 | length 4.4
  Top Layer w0.254: Q4.3@109.982,74.481 114.265,74.481 D4.2@114.324,74.422
NetD5_1: D5.1 R16.1 | length 3.1
  Top Layer w0.254: D5.1@117.324,78.232 117.983,78.232 118.86,79.109 R16.1@120.015,79.109
NetD5_2: D5.2 Q5.3 | length 4.4
  Top Layer w0.254: Q5.3@109.982,78.291 114.265,78.291 D5.2@114.324,78.232
NetD6_1: D6.1 R17.1 | length 3
  Top Layer w0.254: D6.1@117.324,82.042 118.11,82.042 118.86,82.792 R17.1@120.015,82.792
NetD6_2: D6.2 Q6.3 | length 4.4
  Top Layer w0.254: Q6.3@109.982,82.101 114.265,82.101 D6.2@114.324,82.042
NetD7_1: D7.1 R18.1 | length 3.1
  Top Layer w0.254: D7.1@117.324,85.852 118.11,85.852 118.872,86.614 120.13,86.614 R18.1@120.142,86.602
NetD7_2: D7.2 Q7.3 | length 4.4
  Top Layer w0.254: Q7.3@109.982,85.911 114.265,85.911 D7.2@114.324,85.852
NetD8_1: D8.1 R19.1 | length 3.2
  Top Layer w0.254: D8.1@117.324,89.662 118.11,89.662 118.999,90.551 120.13,90.551 R19.1@120.142,90.539
NetD8_2: D8.2 Q8.3 | length 4.4
  Top Layer w0.254: Q8.3@109.982,89.721 114.265,89.721 D8.2@114.324,89.662
NetD9_1: D9.1 R20.1 | length 3.3
  Top Layer w0.254: D9.1@117.324,93.472 117.729,93.472 118.999,94.742 120.13,94.742 R20.1@120.142,94.73
NetD9_2: D9.2 Q9.3 | length 4.4
  Top Layer w0.254: Q9.3@109.982,93.531 114.265,93.531 D9.2@114.324,93.472
NetJTAG_1: JTAG.1 U1.207 U2.6 | length 88.1
  Top Layer w0.254: v1(71.374,23.622) 70.358,23.622 69.596,24.384 69.596,25.4 70.3,26.104 U1.207@71.51,26.104
  Mid-Layer 1 w0.254: JTAG.1@53.848,59.309 52.324,57.785 52.324,36.576 65.278,23.622 v1(71.374,23.622)
  Bottom Layer w0.254: JTAG.1@53.848,59.309 55.118,60.579 57.023,60.579 57.658,61.214 57.658,62.611 58.293,63.246 64.345,63.246 70.612,56.979 70.612,52.404 71.12,51.896 71.12,49.53 68.199,46.609 U2.6@66.803,46.609
NetJTAG_3: JTAG.3 U1.157 | length 18.5
  Top Layer w0.254: JTAG.3@56.388,59.309 57.912,57.785 61.849,57.785 67.027,52.607 70.006,52.607 U1.157@71.51,51.104
NetJTAG_5: JTAG.5 U1.2 U2.5 | length 89.7
  Top Layer w0.254: v1(71.374,21.082) 72.644,21.082 74.11,22.548 U1.2@74.11,23.504
  Mid-Layer 1 w0.254: JTAG.5@58.928,59.309 57.785,60.452 52.324,60.452 51.054,59.182 51.054,33.655 63.627,21.082 v1(71.374,21.082)
  Bottom Layer w0.254: JTAG.5@58.928,59.309 60.198,60.579 65.837,60.579 70.104,56.312 70.104,52.193 70.612,51.685 70.612,49.784 68.707,47.879 U2.5@66.803,47.879 U2.5@66.168,47.879
NetJTAG_9: JTAG.9 U2.4 | length 16.3
  Bottom Layer w0.254: JTAG.9@64.008,59.309 65.913,59.309 69.469,55.753 69.469,52.11 70.104,51.475 70.104,50.633 69.596,50.125 69.596,50.038 68.707,49.149 U2.4@66.803,49.149
NetM0_2: M0.2 U1.52 | length 34.2
  Top Layer w0.254: U1.52@99.11,23.504 99.246,23.368 100.33,23.368 101.727,21.971 v1(101.727,20.955)
  Bottom Layer w0.254: v1(101.727,20.955) 124.587,20.955 125.73,22.098 125.73,25.781 M0.2@127,27.051
NetM1_2: M1.2 U1.50 | length 35
  Top Layer w0.254: U1.50@98.11,23.504 98.11,24.831 98.425,25.146 99.441,25.146 102.997,21.59 v1(102.997,19.558)
  Bottom Layer w0.254: v1(102.997,19.558) 103.886,20.447 125.095,20.447 M1.2@127,22.352
NetM2_2: M2.2 U1.54 | length 38.2
  Top Layer w0.254: U1.54@101.21,26.104 102.293,26.104 104.14,24.257 v1(104.14,21.971)
  Bottom Layer w0.254: v1(104.14,21.971) 104.14,21.59 104.331,21.78 104.648,21.463 124.079,21.463 125.095,22.479 125.095,29.909 ; 125.159,29.909 M2.2@127,31.75 M2.2@126.746,31.75
NetO1E_2: O1E.2 U6.1 | length 4.9
  Top Layer w0.254: U6.1@115.189,40.513 115.189,43.942 O1E.2@116.205,44.958
NetO2E_2: O2E.2 U18.1 | length 4.6
  Top Layer w0.254: U18.1@119.253,27.94 O2E.2@119.253,32.512
NetP1_A4: P1.A4 P1.B4 | length 14.1
  Top Layer w0.254: v1(43.434,10.795) 43.434,9.779 45.599,7.614 P1.B4@45.599,4.628
  Bottom Layer w0.254: v1(43.434,10.795) 43.561,10.668 43.561,9.652 45.599,7.614 P1.A4@45.599,4.628
NetP1_B9: P1.B9 R5.2 | length 6.7
  Top Layer w0.254: R5.2@50.927,10.934 51.949,9.912 P1.B9@51.949,4.628
NetP1_B11: P1.B11 R6.2 | length 6.5
  Top Layer w0.254: P1.B11@54.489,4.628 54.489,9.773 54.483,9.779 54.991,10.287 R6.2@54.991,10.934
NetQ1_1: Q1.1 R2.1 U1.104 U2.10 | length 97.6
  Top Layer w0.254: U1.104@101.21,51.104 101.21,52.696 v1(101.346,52.832) ; v1(117.221,56.261) 119.26,56.261 Q1.1@119.319,56.202
  Mid-Layer 1 w0.254: v1(63.119,38.862) 63.119,39.878 63.246,40.005 60.96,42.291 60.96,49.254 59.195,51.019 59.195,52.718 62.992,56.515 69.469,56.515 v1(70.993,58.039) v1@71.12,58.039 ; v1@75.978,63.087 83.82,55.245 95.885,55.245 97.269,56.629 98.819,56.629 101.346,54.102 v1(101.346,52.832) ; v1@76.2,62.928 v1@76.2,62.992
  Bottom Layer w0.254: R2.1@63.119,36.945 63.119,38.989 64.135,40.005 65.279,40.005 U2.10@66.803,41.529 ; v1@70.982,58.05 75.999,63.066 75.819,63.246 75.946,63.246 76.2,62.992 76.2,62.928 v1(76.01,63.119) ; v1(70.993,58.039) v1@71.12,58.039 ; v1(101.346,52.832) 107.061,52.832 110.49,56.261 v1(117.221,56.261)
NetR1_1: R1.1 U1.107 U2.8 | length 78.2
  Top Layer w0.254: U1.107@98.11,53.204 98.11,55.438 v1(98.298,55.626)
  Mid-Layer 1 w0.254: v1(61.087,38.862) 61.087,39.878 60.39,40.575 60.39,48.895 58.699,50.586 58.699,52.984 62.738,57.023 67.564,57.023 69.701,59.16 v1@69.701,59.436 ; v1@74.689,64.503 v1(74.689,64.262) 74.689,62.957 75.721,61.925 76.439,61.925 83.628,54.737 96.077,54.737 96.966,55.626 v1(98.298,55.626)
  Bottom Layer w0.254: R1.1@61.341,36.945 61.087,37.199 v1(61.087,38.862) 61.087,41.656 62.357,42.926 65.025,42.926 U2.8@66.168,44.069 ; v1@69.737,59.552 69.979,59.552 v1(74.689,64.262)
  other v1: 69.85,59.309